# Altium PCB MASTERs26_PCB.PcbDoc (part 3 of 3)
Units mm, origin at the board's own origin, x right, y up, seen from the top; angles counter-clockwise.
Board outline 170 x 105 mm, 4 copper layers (Top Layer, Layer 2, PWR, Bottom Layer), stack 1.58 mm thick; 78 components, 59 nets, 255 pads, 54 vias.
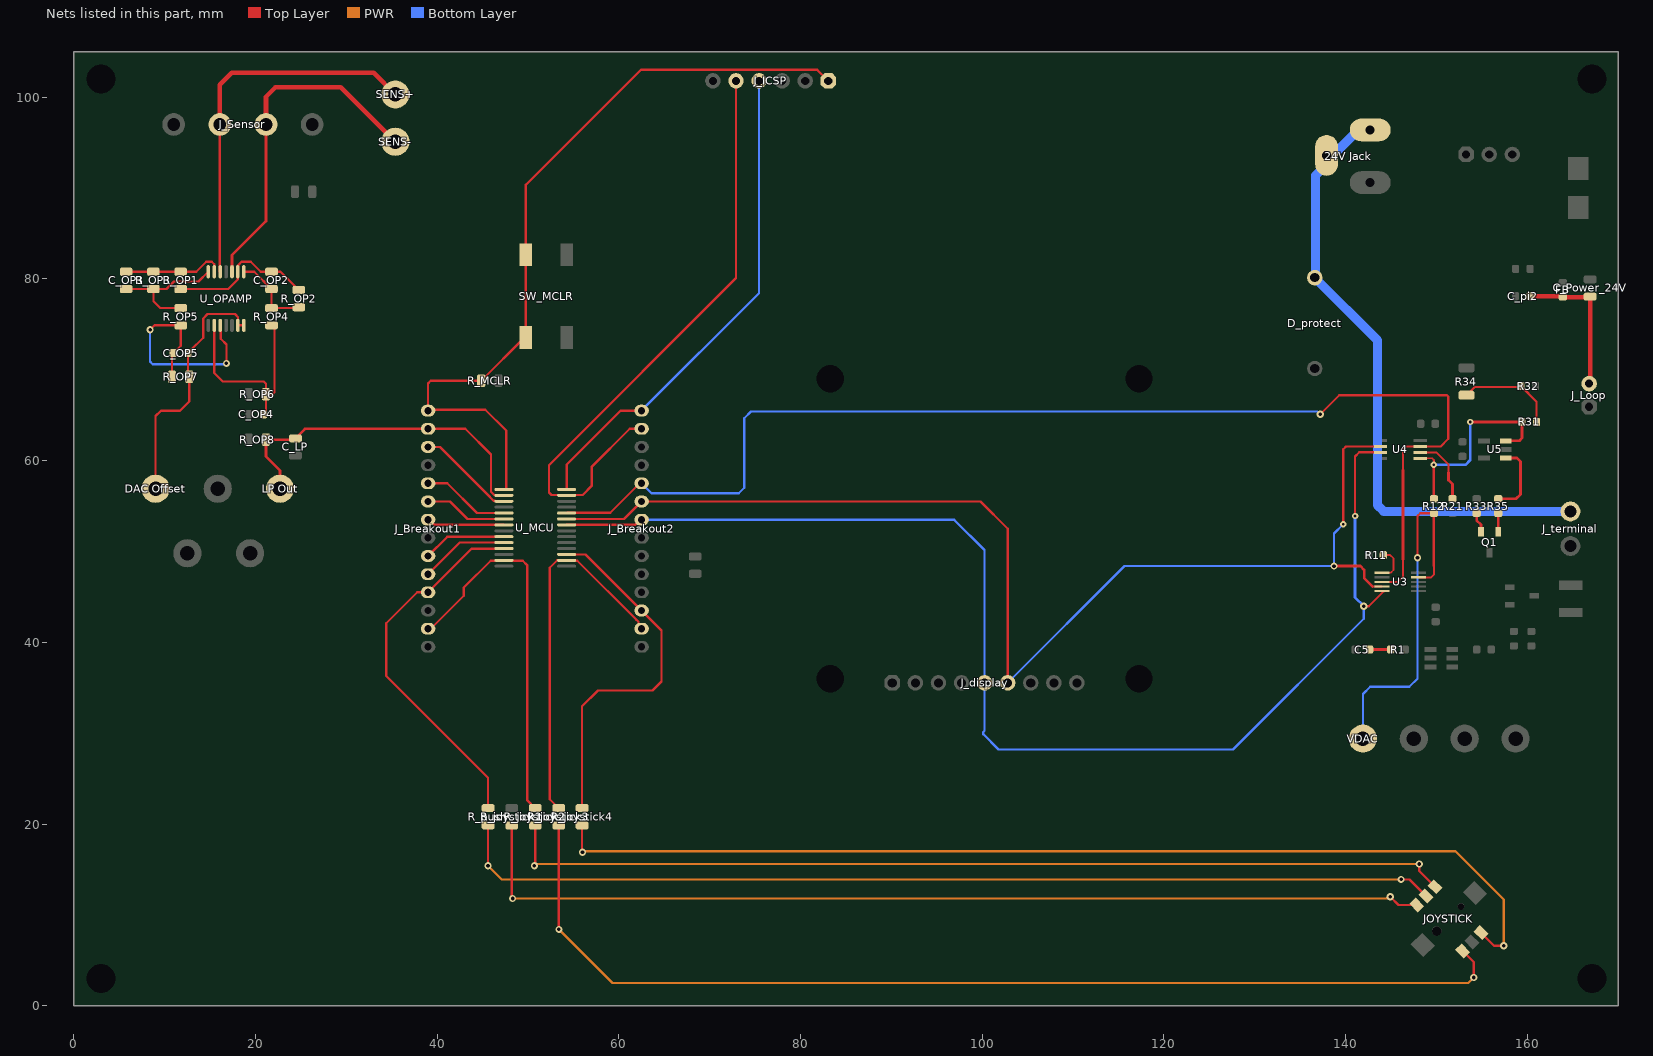
[diagram p4: the nets of this part, all layers, seen from the top]

## Via types
v1: diameter 0.8, hole 0.4, Top Layer to Bottom Layer, 30 vias
v2: diameter 0.7, hole 0.3, Top Layer to Bottom Layer, 24 vias

## Nets (pads, with @x,y where several pads share a name; then routed paths per layer and width w, separated by ;. In a path a pad name is that pad's centre, name@x,y a point inside that pad or via, vN(x,y) a via of type N, cw(c..) or ccw(c..) an arc to the next point about the centre after c; other vN are vias at no path point) (continued)
JOY2: J_Breakout1.13 R_joystick2.2 U_MCU.13 | length 41.9
  Top Layer w0.254: J_Breakout1.13@39,41.5 39.297,41.5 42.92,45.123 42.92,46.02 45.887,48.987 47.312,48.987 U_MCU.13@47.35,49.025 47.388,48.987 49.413,48.987 49.9,48.5 49.9,22.645 R_joystick2.2@50.8,21.745
JOY3: J_Breakout2.13 R_joystick3.1 U_MCU.16 | length 40.7
  Top Layer w0.254: R_joystick3.1@53.375,21.745 52.4,22.72 52.4,48.201 53.224,49.025 U_MCU.16@54.25,49.025 54.288,48.987 55.251,48.987 55.262,48.977 55.421,48.977 61.925,42.473 61.927,42.473 62.15,42.25 62.15,41.85 J_Breakout2.13@62.5,41.5
JOY4: J_Breakout2.12 R_joystick4.1 U_MCU.17 | length 40.6
  Top Layer w0.254: U_MCU.17@54.25,49.675 56.325,49.675 J_Breakout2.12@62.5,43.5 64.7,41.3 64.7,35.7 63.7,34.7 57.7,34.7 55.95,32.95 R_joystick4.1@55.95,21.745
JOY_PUSH: J_Breakout1.11 R_push.1 U_MCU.11 | length 41.3
  Top Layer w0.254: R_push.1@45.6,21.75 45.6,25.1 34.4,36.3 34.4,42.1 37.8,45.5 J_Breakout1.11@39,45.5 43.787,50.287 47.312,50.287 U_MCU.11@47.35,50.325
LPF_OUT: "LP Out.1" C_LP.2 J_Breakout1.2 R_OP8.2 U_MCU.2 | length 38.2
  Top Layer w0.254: J_Breakout1.2@39,63.5 43.1,63.5 45.923,60.677 45.923,56.576 46.276,56.223 46.338,56.223 46.349,56.213 47.312,56.213 U_MCU.2@47.35,56.175
  Top Layer w0.3: 22.7,56.9 22.7,58.9 21.15,60.45 R_OP8.2@21.15,62.3 24.25,62.3 C_LP.2@24.4,62.45 25.45,63.5 J_Breakout1.2@39,63.5
M\C\L\R\: J_Breakout1.1 J_ICSP.1 R_MCLR.2 SW_MCLR.1 SW_MCLR.2 U_MCU.1 | length 87.8
  Top Layer w0.254: U_MCU.1@47.35,56.825 47.509,56.825 47.6,56.916 47.6,63.3 45.3,65.6 39.1,65.6 J_Breakout1.1@39,65.5 39,68.5 39.3,68.8 R_MCLR.2@44.85,68.8 49.6,73.55 SW_MCLR.1@49.75,73.55 SW_MCLR.2@49.75,82.481 ; SW_MCLR.2@49.75,82.65 49.75,90.35 62.427,103.027 81.823,103.027 J_ICSP.1@83.05,101.8
"Net24V Jack_2": "24V Jack.2" "24V Jack.3" D_protect.2 J_terminal.2 | length 69.4
  Bottom Layer w1: 142.7,96.4 141.415,96.4 139.2,94.185 138.485,94.185 137.9,93.6 137.9,92.6 136.7,91.4 136.7,80.239 D_protect.2@136.6,80.139 143.5,73.239 143.5,55.1 144.196,54.404 J_terminal.2@164.739,54.404
NetC5_2: C5.2 R1.1 | length 2.3
  Top Layer w0.3: C5.2@142.639,39.202 R1.1@144.961,39.202
NetC_OP2_1: C_OP2.1 R_OP1.2 R_OP2.1 U_OPAMP.2 | length 16.4
  Top Layer w0.25: R_OP1.2@11.763,78.888 16.991,78.888 18.063,79.959 U_OPAMP.2@18.063,80.788 18.063,81.476 18.474,81.888 19.47,81.888 20.57,80.788 C_OP2.1@21.763,80.788 22.763,80.788 R_OP2.1@24.763,78.788
NetC_OP2_2: C_OP2.2 R_OP2.2 R_OP4.2 U_OPAMP.1 | length 8.8
  Top Layer w0.25: U_OPAMP.1@18.713,80.788 19.863,80.788 C_OP2.2@21.763,78.888 R_OP4.2@21.763,76.788 R_OP2.2@24.663,76.788
NetC_OP3_1: C_OP3.1 R_OP1.1 R_OP3.1 U_OPAMP.6 | length 11.1
  Top Layer w0.25: C_OP3.1@5.763,80.788 R_OP3.1@8.763,80.788 R_OP1.1@11.763,80.788 13.474,80.788 14.574,81.888 15.191,81.888 15.463,81.616 U_OPAMP.6@15.463,80.788
NetC_OP3_2: C_OP3.2 R_OP3.2 R_OP5.1 U_OPAMP.7 | length 14.5
  Top Layer w0.25: C_OP3.2@5.763,78.888 R_OP3.2@8.763,78.888 ; R_OP5.1@11.763,76.788 9.512,76.788 8.763,77.538 R_OP3.2@8.763,78.888 ; U_OPAMP.7@14.813,80.788 13.738,79.713 11.039,79.713 10.214,78.888 R_OP3.2@8.763,78.888
NetC_OP4_1: C_OP4.1 R_OP4.1 R_OP6.1 U_OPAMP.9 | length 23.4
  Top Layer w0.254: U_OPAMP.9@15.463,74.888 15.463,69.638 16.4,68.7 20.9,68.7 21.15,68.45 R_OP6.1@21.15,67.3 ; C_OP4.1@20.9,65.1 21.15,65.35 R_OP6.1@21.15,67.3 ; R_OP4.1@21.763,74.888 21.784,74.888 22.1,74.572 22.1,67.515 21.885,67.3 R_OP6.1@21.15,67.3
NetC_OP5_1: C_OP5.1 R_OP5.2 R_OP7.1 U_OPAMP.10 | length 26.2
  Top Layer w0.25: v1(8.4,74.4) 8.888,74.888 R_OP5.2@11.763,74.888 11.763,72.638 C_OP5.1@10.963,71.838 10.8,71.675 R_OP7.1@10.8,69.232 ; U_OPAMP.10@16.113,74.888 16.113,74.322 16.188,74.247 16.188,74.181 16.188,73.403 16.8,72.79 v1(16.8,70.7)
  Bottom Layer w0.25: v1(8.4,74.4) 8.4,70.9 8.7,70.6 16.7,70.6 v1(16.8,70.7)
NetC_OP5_2: "DAC Offset.1" C_OP5.2 R_OP7.2 U_OPAMP.13 U_OPAMP.14 | length 28
  Top Layer w0.25: 9,56.9 9,64.9 9.6,65.5 11.7,65.5 12.7,66.5 R_OP7.2@12.7,69.232 12.563,69.37 12.563,71.847 12.878,72.163 12.888,72.163 14.238,73.513 14.238,75.651 14.724,76.138 17.737,76.138 18.085,75.79 18.085,74.91 U_OPAMP.13@18.063,74.888 U_OPAMP.14@18.713,74.888
NetC_pi2_2: C_pi2.2 C_Power_24V.2 FB.2 J_Loop.2 | length 16.3
  Top Layer w0.5: C_pi2.2@160.3,78.1 163.8,78.1 FB.2@163.9,78 166.85,78 C_Power_24V.2@166.9,78.05 166.9,68.57 J_Loop.2@166.8,68.47
NetJOYSTICK_1: JOYSTICK.1 R_joystick2.1 | length 105.2
  Top Layer w0.254: v1(50.7,15.4) 50.8,15.5 R_joystick2.1@50.8,19.845 ; v1(148.1,15.6) 148.1,14.828 JOYSTICK.1@149.836,13.092
  PWR w0.254: v1(50.7,15.4) 50.848,15.4 51.048,15.6 v1(148.1,15.6)
NetJOYSTICK_2: JOYSTICK.2 R_push.2 | length 109.1
  Top Layer w0.254: v1(45.6,15.4) R_push.2@45.6,19.85 ; v1(146.1,13.9) 147.013,13.9 JOYSTICK.2@148.829,12.084
  PWR w0.254: v1(45.6,15.4) 47.1,13.9 v1(146.1,13.9)
NetJOYSTICK_3: JOYSTICK.3 R_joystick1.2 | length 108.1
  Top Layer w0.254: R_joystick1.2@48.2,19.85 48.2,11.9 v1(48.3,11.8) ; v1(144.9,12) 145.823,11.077 JOYSTICK.3@147.821,11.077
  PWR w0.254: v1(48.3,11.8) 144.552,11.8 144.752,12 v1(144.9,12)
NetJOYSTICK_4: JOYSTICK.4 R_joystick4.2 | length 114.8
  Top Layer w0.25: R_joystick4.2@55.95,19.845 55.95,16.95 v1(56,16.9) ; JOYSTICK.4@154.892,8.036 156.328,6.6 v1(157.4,6.6)
  PWR w0.25: v1(56,16.9) 56.1,17 152.1,17 157.4,11.7 v1(157.4,6.6)
NetJOYSTICK_6: JOYSTICK.6 R_joystick3.2 | length 118.3
  Top Layer w0.25: R_joystick3.2@53.375,19.845 53.375,8.425 v1(53.4,8.4) ; JOYSTICK.6@152.877,6.021 154.1,4.798 v1(154.1,3.1)
  PWR w0.25: v1(53.4,8.4) 59.3,2.5 153.5,2.5 v1(154.1,3.1)
NetQ1_1: Q1.1 R35.2 | length 2
  Top Layer w0.3: Q1.1@156.797,52.173 R35.2@156.797,54.199
NetQ1_2: Q1.2 R33.2 | length 2.2
  Top Layer w0.3: R33.2@154.422,54.199 154.422,53.429 154.897,52.954 Q1.2@154.897,52.173
NetR11_2: R11.2 U3.6 | length 4
  Top Layer w0.2: U3.6@143.991,47.649 144.958,47.649 145.266,47.958 145.266,49.248 144.914,49.6 R11.2@144.141,49.6
NetR31_1: R31.1 R32.1 R34.1 | length 11.1
  Top Layer w0.254: R34.1@153.3,67.2 154.2,68.1 159.2,68.1 R32.1@159.3,68.2 161.011,66.489 R31.1@161.011,64.259
NetR35_1: R35.1 U5.1 | length 8
  Top Layer w0.3: R35.1@156.797,55.799 158.761,55.799 159.239,56.277 159.239,59.886 158.843,60.282 U5.1@157.622,60.282
P0B: R21.2 U4.6 | length 7.6
  Top Layer w0.2: U4.6@148.216,60.907 149.963,60.907 151.323,59.547 151.323,58.699
  Top Layer w0.3: 151.323,58.699 151.323,57.849 151.765,57.407 R21.2@151.765,55.799
P0W: R12.2 R31.2 U4.5 U5.3 | length 23.6
  Top Layer w0.2: U4.5@148.216,60.257 149.514,60.257 149.71,60.061 v2(149.71,59.532)
  Top Layer w0.3: R12.2@149.71,55.799 v2(149.71,59.532) ; v2(153.714,64.251) 153.722,64.259 R31.2@159.411,64.259 159.411,62.482 159.111,62.182 U5.3@157.622,62.182
  Bottom Layer w0.3: v2(149.71,59.532) 153.189,59.532 153.714,60.056 v2(153.714,64.251)
PGC: J_Breakout2.2 J_ICSP.5 U_MCU.27 | length 68.4
  Top Layer w0.254: J_Breakout2.2@62.5,63.5 61.2,63.5 57,59.3 57,57.2 56.013,56.213 54.25,56.213 53.249,56.213 53.238,56.223 52.577,56.223 52.3,56.5 52.3,59.5 72.89,80.09 J_ICSP.5@72.89,101.8
PGD: J_Breakout2.1 J_ICSP.4 U_MCU.28 | length 55.1
  Top Layer w0.254: U_MCU.28@54.25,56.825 54.25,59.55 60.2,65.5 J_Breakout2.1@62.5,65.5
  Bottom Layer w0.254: J_Breakout2.1@62.5,65.5 75.43,78.43 J_ICSP.4@75.43,101.8
RA1: J_Breakout1.3 U_MCU.3 | length 10.8
  Top Layer w0.254: J_Breakout1.3@39,61.5 40.3,61.5 45.419,56.381 45.419,56.367 46.213,55.573 46.338,55.573 46.349,55.563 47.312,55.563 U_MCU.3@47.35,55.525
RA3: J_Breakout1.5 U_MCU.5 | length 9.7
  Top Layer w0.254: J_Breakout1.5@39,57.5 41.1,57.5 44.375,54.225 U_MCU.5@47.35,54.225
RA4: J_Breakout1.6 U_MCU.6 | length 9.1
  Top Layer w0.254: J_Breakout1.6@39,55.5 41.4,55.5 43.325,53.575 U_MCU.6@47.35,53.575
RA5: J_Breakout1.7 U_MCU.7 | length 8.6
  Top Layer w0.254: J_Breakout1.7@39,53.5 39.15,53.5 39.725,52.925 U_MCU.7@47.35,52.925
RA6: J_Breakout1.10 U_MCU.10 | length 9.8
  Top Layer w0.254: J_Breakout1.10@39,47.5 42.475,50.975 U_MCU.10@47.35,50.975
RA7: J_Breakout1.9 U_MCU.9 | length 9.2
  Top Layer w0.254: J_Breakout1.9@39,49.5 41.125,51.625 U_MCU.9@47.35,51.625
SCK: J_Breakout2.6 J_display.6 U3.9 U4.2 U_MCU.23 | length 133
  Top Layer w0.2: 142.951,46.149 U3.9@143.991,46.149
  Top Layer w0.25: v2(139.739,52.999) 139.739,61.262 140.034,61.557 U4.2@143.816,61.557
  Top Layer w0.254: U_MCU.23@54.25,53.575 60.575,53.575 J_Breakout2.6@62.5,55.5 99.8,55.5 102.795,52.505 J_display.6@102.795,35.541
  Top Layer w0.3: v1(138.721,48.39) 141.61,48.39 142.041,47.959 142.041,47.059 142.951,46.149
  Bottom Layer w0.254: J_display.6@102.795,35.541 115.644,48.39 v1(138.721,48.39) 138.721,51.981 v2(139.739,52.999)
SDI_MCU: J_Breakout2.5 U3.8 U4.7 U_MCU.24 | length 134.8
  Top Layer w0.2: U3.8@143.991,46.649 145.742,46.649 146.316,47.223 146.316,49.153 ; 146.316,58.976 146.316,61.191 146.683,61.557 U4.7@148.216,61.557
  Top Layer w0.254: U_MCU.24@54.25,54.225 54.288,54.263 59.063,54.263 62.3,57.5 J_Breakout2.5@62.5,57.5 ; v1(137.2,65.1) 139.3,67.2 151.151,67.2 151.3,67.051 151.3,62.4 150.457,61.557 U4.7@148.216,61.557
  Top Layer w0.3: 146.316,49.153 146.316,58.976
  Bottom Layer w0.254: J_Breakout2.5@62.5,57.5 63.6,56.4 73.2,56.4 73.8,57 73.8,64.651 74.549,65.4 136.864,65.4 137.164,65.1 v1(137.2,65.1)
SDO_MCU: J_Breakout2.7 J_display.5 U3.10 U4.3 U_MCU.22 | length 140.6
  Top Layer w0.25: v2(141.039,53.896) 141.039,58.999 141.039,60.462 141.484,60.907 U4.3@143.816,60.907
  Top Layer w0.254: U_MCU.22@54.25,52.925 61.775,52.925 62.35,53.5 J_Breakout2.7@62.5,53.5 ; v1(141.995,43.973) 142.55,43.973 U3.10@144.2,45.622
  Bottom Layer w0.254: J_Breakout2.7@62.5,53.5 96.9,53.5 100.255,50.145 J_display.5@100.255,35.541 100.255,30.255 100.105,30.105 100.105,29.895 101.8,28.2 127.6,28.2 141.995,42.595 v1(141.995,43.973)
  Bottom Layer w0.3: v2(141.039,53.896) 141.039,44.929 v1(141.995,43.973)
SENSOR_IN+: J_Sensor.3 SENS+.1 U_OPAMP.5 | length 41.4
  Top Layer w0.3: U_OPAMP.5@16.08,80.82 J_Sensor.3@16.08,97
  Top Layer w0.5: J_Sensor.3@16.08,97 16.08,101.38 17.4,102.7 33,102.7 SENS+.1@35.4,100.3
SENSOR_IN-: J_Sensor.2 SENS-.1 U_OPAMP.3 | length 38
  Top Layer w0.3: U_OPAMP.3@17.413,80.788 17.413,82.613 21.16,86.36 J_Sensor.2@21.16,97
  Top Layer w0.5: J_Sensor.2@21.16,97 21.16,100.06 22.2,101.1 29.4,101.1 SENS-.1@35.4,95.1
VDAC: R12.1 U3.4 VDAC.1 | length 40
  Top Layer w0.2: U3.4@148.041,47.149 149.408,47.149 149.71,47.451 149.71,48.435
  Top Layer w0.254: v1(147.9,49.3) 147.9,53.9 148.199,54.199 R12.1@149.71,54.199
  Top Layer w0.3: 149.71,48.435 R12.1@149.71,54.199
  Bottom Layer w0.254: VDAC.1@141.9,29.4 141.9,34.3 142.7,35.1 147,35.1 147.9,36 v1(147.9,49.3)
pads on no net: J_display.8 J_ICSP.6 JOYSTICK.9 JOYSTICK.10 U3.5

## Polygon pours and split planes (outlines as drawn)
GND on Bottom Layer "GND_L04_P007" (solid, remove dead copper, pour order 7): 0,0 0,105 170,105 170,0
GND on Top Layer "GND_L01_P008" (solid, remove dead copper, pour order 8): 0,0 0,105 170,105 170,0
3.3V on PWR "3.3V_L03_P009" (solid, remove dead copper, pour order 9): 0,0 0,105 170,105 170,0
GND on Layer 2 "GND_L02_P010" (solid, remove dead copper, pour order 10): 0,0 0,105 170,105 170,0

## Keep-outs
Keep-Out Layer:
  text "'.Layer_Name'" at 295.5,-112.75 h1.5

## Other copper
Top Layer:
  text "'.ProjectPCBFabRevision'" at 330.678,-112.572 h1.5
  text "'.Layer_Name'" at 295.5,-112.75 h1.5
Bottom Layer:
  text "'.ProjectPCBFabNumber'-R'.ProjectPCBFabRevision'" at 223.219,-63.22 h1.2
  text ".ProjectPCBFabRevision" at 330.678,-112.572 h1.5
  text "'.Layer_Name'" at 295.5,-112.75 h1.5

## Silkscreen, mask and mechanical layers (free items; w line width, h text height)
Top Overlay:
  region: 284.8,-76.1 284.8,-74.1 286.8,-75.1
  lines w0.254: 134.882,105 134.882,73.318 135.19,73.01 170,73.01
  lines w0.5: 0.9,32.3 31.7,32.3 31.7,85.4 0.9,85.4 0.9,32.3 ; 32.3,32.3 71.4,32.3 71.4,85.4 32.3,85.4 32.3,32.3 ; 130.4,25.7 168.8,25.7 168.8,72.2 130.4,72.2 130.4,25.7
  text "GND" at 9.5,102.6 h1
  text "SENS+" at 13.667,102.6 h1
  text "SENS-" at 19.4,102.6 h1
  text "VDD" at 25.2,102.5 h1
  text "Terminal power" at 161.433,100.3 h1 r270
  text "PGC" at 72.3,99.6 h1 r270
  text "PGD" at 74.825,99.6 h1 r270
  text "GND" at 77.35,99.6 h1 r270
  text "VDD" at 79.875,99.6 h1 r270
  text "MCLR" at 82.4,99.6 h1 r270
  text "Jack power" at 149.933,97.9 h1 r270
  text "M" at 100.3,94.4 h10
  text "'.ProjectPartNumber'" at 97.2,90.9 h5
  text "/MCLR" at 34.9,65.1 h0.5
  text "PGD" at 64.4,65.1 h0.5
  text "PGC" at 64.4,63.3 h0.5
  text "ADC IN" at 34.483,63.1 h0.5
  text "/CS1_DAC" at 64.3,61.417 h0.5
  text "RA1" at 36.066,61.118 h0.5
  text "/CS2_DP" at 64.3,59.311 h0.5
  text "DACOffset" at 33.1,59.2 h0.5
  text "SDI_MCU" at 64.3,57.189 h0.5
  text "RA3" at 35.899,57.1 h0.5
  text "-" at 160.011,55.499 h2 r180
  text "SCK" at 64.3,55.294 h0.5
  text "RA4" at 35.899,55 h0.5
  text "SDO_MCU" at 64.3,53.263 h0.5
  text "RA5" at 35.899,53.1 h0.5
  text "+" at 160.011,51.449 h2 r180
  text "CS3_Adafruit" at 64.3,51.263 h0.5
  text "GND" at 35.899,51.1 h0.5
  text "VDD" at 64.3,49.27 h0.5
  text "RA7" at 35.899,49.1 h0.5
  text "GND" at 64.3,47.311 h0.5
  text "RA6" at 35.899,47.2 h0.5
  text "EIN" at 64.3,45.263 h0.5
  text "JOY PUSH" at 33.4,45 h0.5
  text "JOY UP" at 64.3,43.173 h0.5
  text "JOY LEFT" at 33.4,43 h0.5
  text "JOY RIGHT" at 64.3,41.198 h0.5
  text "JOY DOWN" at 33.4,41.1 h0.5
  text "I2C_SDA" at 64.3,39.159 h0.5
  text "I2C_SCK" at 33.983,38.983 h0.5
  text "EIN" at 89.4,33.083 h1 r270
  text "VDD" at 91.975,33.083 h1 r270
  text "VDD" at 94.55,33.083 h1 r270
  text "CS3" at 97.125,33.083 h1 r270
  text "SDO_MCU" at 99.7,33.083 h1 r270
  text "SCK" at 102.442,33.083 h1 r270
  text "GND" at 105.017,33.083 h1 r270
  text "NC" at 107.592,33.083 h1 r270
  text "VDD" at 110.167,33.083 h1 r270
  text "Microcontroller" at 37.9,29 h2
  text "Analog" at 10.5,28.966 h2
  text "Front End" at 7.6,25.3 h2
  text "Display Breakout" at 85.4,22.366 h2
  text "4-20mA Loop Driver" at 132.9,21.866 h2
  text "C" at 246.245,-66.043 h8
  text "1" at 255.096,-66.649 h5
  text "'.ProjectPartNumber'" at 214.71,-66.903 h1.2
  text "" at 239.245,-67.346 h8
  text "5" at 273.5,-68.194 h8
  text "7" at 283.5,-68.194 h8
  text "0" at 293.5,-68.194 h8
  text "1" at 303.5,-68.194 h8
  text "6" at 263.5,-68.227 h8
  text "2" at 313.5,-68.227 h8
  text "3" at 323.5,-68.227 h8
  text "4" at 333.58,-68.227 h8
  text "ICD" at 279.4,-76 h1.52
  text "" at 310,-82.959 h10
  text "" at 289,-82.984 h10
  text "" at 300,-82.984 h10
  text "" at 319,-82.984 h10
  text "" at 330,-82.984 h10
  text "" at 341,-83.159 h10
  text "*h" at 222.7,-84 h7
  text "" at 281,-86 h10
  text "dsPICDEM.net™" at 180.75,-92.75 h3
  text "mTouch®" at 203,-92.75 h3
  text "chipKIT™" at 217.25,-92.75 h3
  text "dsPICDEM™" at 180.5,-98.5 h3
  text "MPLAB®" at 203,-99 h3
  text "dsPIC®" at 217.25,-99 h3
  text "PICDEM.net™" at 180.5,-104.75 h3
  text "PICkit™" at 203.25,-105 h3
  text "PIC®" at 217.25,-105 h3
  text "PICDEM™" at 180.5,-111.25 h3
  text "PICtail™" at 203.25,-111.25 h3
  text "'.ProjectPCBFabRevision'" at 330.678,-112.572 h1.5
  text "'.Layer_Name'" at 295.5,-112.75 h1.5
Bottom Overlay:
  text "-" at 161.139,55.499 h2 r180
  text "+" at 161.139,51.533 h2 r180
  text "'.ProjectPCBFabRevision'" at 330.678,-112.572 h1.5
  text "'.Layer_Name'" at 295.5,-112.75 h1.5
Top Paste:
  text "'.ProjectPCBFabRevision'" at 330.678,-112.572 h1.5
  text "'.Layer_Name'" at 295.5,-112.75 h1.5
Bottom Paste:
  text "'.ProjectPCBFabRevision'" at 330.678,-112.572 h1.5
  text "'.Layer_Name'" at 295.5,-112.75 h1.5
Top Solder:
  text "'.ProjectPCBFabRevision'" at 330.678,-112.572 h1.5
  text "'.Layer_Name'" at 295.5,-112.75 h1.5
Bottom Solder:
  text "'.ProjectPCBFabRevision'" at 330.678,-112.572 h1.5
  text "'.Layer_Name'" at 295.5,-112.75 h1.5
NOTES (M1):
  text "'.Layer_Name'" at 313.5,-112.75 h1.5
BOARD (M2):
  the board outline again, w0.1
  text "'.ProjectPCBFabRevision'" at 330.678,-112.572 h1.5
  text "'.Layer_Name'" at 295.5,-112.75 h1.5
REF POINTS (M3):
  text "'.Layer_Name'" at 295.5,-112.75 h1.5
FAB (M4):
  drawing of 160 lines, arcs and shapes, not listed
  text "THIS PCB TO BE MANUFACTURED TO MEET ALL ACCEPTANCE LEVELS" at 232.93,109.486 h1.78
  text "OF A CLASS 2 PCB PER ANSI/IPC-A-600G." at 232.93,105.676 h1.78
  text "MATERIAL:" at 232.93,101.056 h1.78
  text "FR-4 or Equivalent" at 253.25,101.056 h1.78
  text "CONTROLLED IMPEDANCE" at 309.441,96.824 h1.78
  text "MULTILAYER" at 258.965,96.706 h1.78
  text "2" at 282.46,96.706 h1.78
  text "LAYERS" at 286.905,96.706 h1.78
  text "Cu WEIGHT EXTERNAL LAYERS" at 253.25,91.856 h1.78
  text "35um" at 305.32,91.856 h1.78
  text "FINISHED" at 314.845,91.856 h1.78
  text "Cu WEIGHT INTERNAL LAYERS" at 253.25,87.006 h1.78
  text "N/A" at 305.32,87.006 h1.78
  text "FINISHED" at 314.845,87.006 h1.78
  text "FINISHED OVERALL THICKNESS" at 253.25,82.156 h1.78
  text "1.6" at 306.59,82.156 h1.78
  text "mm" at 314.845,82.156 h1.78
  text "10" at 329.45,82.156 h1.78
  text "%" at 337.705,82.156 h1.78
  text "COPPER THIEVING ALLOWED" at 253.441,77.324 h1.78
  text "YES" at 310.441,77.324 h1.78
  text "NO" at 327.441,77.324 h1.78
  text "X" at 322.032,76.824 h2.6
  text "FINISH:" at 232.941,72.824 h1.78
  text "LEAD-FREE HOT AIR LEVELING" at 258.941,72.524 h1.78
  text "X" at 254.341,71.824 h2.6
  text "IMMERSION GOLD" at 258.965,66.986 h1.78
  text "IMMERSION TIN" at 258.965,61.486 h1.78
  text "SMOBC WITH SELECTIVE GOLD PLATING ON LANDS" at 258.965,57.781 h1.78
  text "INDICATED. 1um GOLD OVER 5-10 um NICKEL" at 258.965,53.971 h1.78
  text "SOLDERMASK" at 253.25,48.636 h1.78
  text "DYNACHEM EPIC 200 LPI OR EQUIVALENT" at 274.84,48.636 h1.78
  text "SOLDERMASK COLOR" at 253.25,42.286 h1.78
  text "GREEN HIGH GLOSS" at 285,42.286 h1.78
  text "SILKSCREEN COLOR" at 253.25,35.936 h1.78
  text "WHITE" at 285,35.936 h1.78
  text "Blind / Burried Vias" at 259.441,29.824 h1.78
  text "DRILLING:" at 233.441,29.574 h1.78
  text "Via Layer Pairs" at 253.941,25.074 h1.78
  text "Top-Bottom" at 274.691,25.074 h1.78
  text "ALL HOLES TO BE LOCATED BY THE COORDINATES FROM THE NC DRILL DATA PROVIDED." at 232.93,19.824 h1.78
  text "'.ProjectPCBFabNumber'" at 264.941,13.324 h1.78
  text "PCB REV" at 300.941,13.324 h1.78
  text "USE ARTWORK SET NO." at 232.93,13.236 h1.78
  text "'.ProjectPCBFabRevision'" at 314.091,13.074 h1.78
  text "ALL UL LOGO, MANUFACTURER'S ID, AND DATE CODES SHALL BE PLACED" at 232.93,6.886 h1.78
  text "ON THE BOTTOM SIDE UNLESS OTHERWISE INDICATED." at 232.93,3.076 h1.78
  text "ANY ALTERNATIVES TO THE ABOVE SPECIFICATIONS MUST FIRST BE APPROVED." at 232.441,-2.176 h1.78
  text "Layer" at 232.794,-14.75 h1.5
  text "Name" at 242.942,-14.75 h1.5
  text "Material" at 266.086,-14.75 h1.5
  text "Thickness" at 287.48,-14.75 h1.5
  text "Constant" at 303.626,-14.75 h1.5
  text "Gerber" at 317.772,-14.75 h1.5
  text "Top Overlay" at 242.942,-17.75 h1.5
  text "GTO" at 317.772,-17.75 h1.5
  text "Top Solder" at 242.942,-20.75 h1.5
  text "Solder Resist" at 266.086,-20.75 h1.5
  text "0.010mm" at 287.48,-20.75 h1.5
  text "3.5" at 303.626,-20.75 h1.5
  text "GTS" at 317.772,-20.75 h1.5
  text "1" at 232.794,-23.75 h1.5
  text "Top Layer" at 242.942,-23.75 h1.5
  text "0.035mm" at 287.48,-23.75 h1.5
  text "GTL" at 317.772,-23.75 h1.5
  text "Dielectric 1" at 242.942,-26.75 h1.5
  text "PP-006" at 266.086,-26.75 h1.5
  text "0.200mm" at 287.48,-26.75 h1.5
  text "4.1" at 303.626,-26.75 h1.5
  text "2" at 232.794,-29.75 h1.5
  text "Layer 2" at 242.942,-29.75 h1.5
  text "CF-004" at 266.086,-29.75 h1.5
  text "0.035mm" at 287.48,-29.75 h1.5
  text "G1" at 317.772,-29.75 h1.5
  text "Dielectric1" at 242.942,-32.75 h1.5
  text "FR-4" at 266.086,-32.75 h1.5
  text "1.200mm" at 287.48,-32.75 h1.5
  text "4.8" at 303.626,-32.75 h1.5
  text "3" at 232.794,-35.75 h1.5
  text "PWR" at 242.942,-35.75 h1.5
  text "CF-004" at 266.086,-35.75 h1.5
  text "0.035mm" at 287.48,-35.75 h1.5
  text "G2" at 317.772,-35.75 h1.5
  text "Dielectric 4" at 242.942,-38.75 h1.5
  text "PP-006" at 266.086,-38.75 h1.5
  text "0.200mm" at 287.48,-38.75 h1.5
  text "4.1" at 303.626,-38.75 h1.5
  text "4" at 232.794,-41.75 h1.5
  text "Bottom Layer" at 242.942,-41.75 h1.5
  text "0.035mm" at 287.48,-41.75 h1.5
  text "GBL" at 317.772,-41.75 h1.5
  text "Bottom Solder" at 242.942,-44.75 h1.5
  text "Solder Resist" at 266.086,-44.75 h1.5
  text "0.010mm" at 287.48,-44.75 h1.5
  text "3.5" at 303.626,-44.75 h1.5
  text "GBS" at 317.772,-44.75 h1.5
  text "Bottom Overlay" at 242.942,-47.75 h1.5
  text "GBO" at 317.772,-47.75 h1.5
  text "Total board thickness:" at 232.794,-50.75 h1.5
  text "1.760mm" at 287.48,-50.75 h1.5
  text "'.ProjectPCBFabRevision'" at 330.678,-112.572 h1.5
  text "'.Layer_Name'" at 295.5,-112.75 h1.5
Case (M5):
  text "'.Layer_Name'" at 295.5,-112.75 h1.5
Cover (M6):
  text "'.Layer_Name'" at 295.5,-112.75 h1.5
Terminal Block (M7):
  text "'.Layer_Name'" at 295.5,-112.75 h1.5
Route Tool Path:
  text "'.Layer_Name'" at 295.5,-112.75 h1.5
V-Cut (M9):
  text "'.Layer_Name'" at 295.5,-112.75 h1.5
Bottom Assembly:
  text "'.VariantName'" at 45.07,-96.75 h0.9
  text "ASSEMBLY VARIANT:" at 59.32,-96.75 h0.9
  text "DOCUMENT NUMBER:" at 13.05,-105 h1.15
  text "'.ProjectPCBAssyNumber'_ASSY-D" at 13.177,-108 h1.4
  text "'.ProjectPCBAssyRevision'" at -3.878,-112.572 h1.5
  text "'.Layer_Name'" at 31,-112.75 h1
Top Assembly:
  text "ASSEMBLY NOTES:" at 138.9,-76.3 h4
  text "1. ALL COMPONENTS SHALL BE RoHS COMPLIANT." at 104.8,-81.4 h3
  text "2. ALL UNUSED THROUGH HOLE COMPONENT LOCATIONS SHALL BE FREE OF SOLDER." at 104.8,-84.4 h3
  text "3. ALL COMPONENTS SHALL BE MOUNTED FLUSH TO THE BOARD, EXCEPT AS NOTED." at 104.8,-87.4 h3
  text "4. FINISHED BOARD SHALL BE FREE OF ALL RESIDUES." at 104.8,-90.4 h3
  text "5. PLACE LABEL  ON THE LOCATION INDICATED." at 104.8,-93.4 h3
  text "6." at 104.8,-96.4 h3
  text "ASSEMBLY VARIANT:" at 267.5,-96.75 h0.9
  text "'.VariantName'" at 281.75,-96.75 h0.9
  text "DOCUMENT NUMBER:" at 313.75,-105 h1.15
  text "'.ProjectPCBAssyNumber'_ASSY-D" at 313.7,-108 h1.4
  text "'.ProjectPCBAssyRevision'" at 330.678,-112.572 h1.5
  text "'.Layer_Name'" at 295.5,-112.75 h1
Bottom 3D Body:
  text "'.Layer_Name'" at 295.5,-112.75 h1.15
Top 3D Body:
  text "'.Layer_Name'" at 295.5,-112.75 h1.2
Bottom Courtyard:
  text ".ProjectPCBFabRevision" at 330.678,-112.572 h1.5
  text "'.Layer_Name'" at 295.5,-112.75 h1
Top Courtyard:
  text "'.ProjectPCBFabRevision'" at 330.678,-112.572 h1.5
  text "'.Layer_Name'" at 295.5,-112.75 h1.1
TITLE (M16):
  lines w0.1: 267,-95.5 348.82,-95.5 ; 319,-88 319,-91 348.82,-91 ; 337.54,-112.635 337.54,-111.365 ; 337.54,-112 347.7,-112 ; 337.7,-110.8 337.7,-109.8 ; 337.7,-110.3 347.7,-110.3 ; 340.08,-112.635 340.08,-111.365 ; 342.62,-112.635 342.62,-111.365 ; 342.7,-110.6 342.7,-110 ; 345.16,-112.635 345.16,-111.365 ; 347.7,-112.635 347.7,-111.365 ; 347.7,-110.8 347.7,-109.8 ; 348.82,-91 348.82,-91
  lines w0.127: -27.1,-58.175 -22.02,-58.175 ; -27.1,2.15 -22.02,2.15 ; -27.1,62.475 -22.02,62.475 ; 36.4,-118.5 36.4,-113.42 ; 36.4,117.72 36.4,122.8 ; 99.9,-118.5 99.9,-113.42 ; 99.9,117.72 99.9,122.8 ; 163.4,-118.5 163.4,-113.42 ; 163.4,117.72 163.4,122.8 ; 198.96,-113.42 234.52,-113.42 ; 226.9,-118.5 226.9,-113.42 ; 226.9,117.72 226.9,122.8 ; 267,-113.42 267,-88 ; 267,-109 348.82,-109 ; 267,-103 348.82,-103 ; 267,-97 348.82,-97 ; 290.4,-118.5 290.4,-113.42 ; 290.4,117.72 290.4,122.8 ; 295,-113.42 295,-97 ; 313,-109 313,-103 ; 326,-113.42 326,-109 ; 333.5,-113.42 333.5,-103 ; 348.82,-82.94 348.82,-113.42 ; 348.82,-58.175 353.9,-58.175 ; 348.82,2.15 353.9,2.15 ; 348.82,62.475 353.9,62.475 ; 348.82,-113.42 348.82,-88 233,-88 233,-113.42 348.82,-113.42 ; 348.82,-113.42 -22.02,-113.42 -22.02,117.72 348.82,117.72 348.82,-113.42 ; -27.1,-118.5 353.9,-118.5 353.9,122.8 -27.1,122.8 -27.1,-118.5
  text "1" at 4.176,119.498 h1.78
  text "2" at 67.566,119.498 h1.78
  text "3" at 130.795,119.498 h1.78
  text "4" at 194.465,119.498 h1.78
  text "5" at 257.939,119.498 h1.78
  text "6" at 321.566,119.498 h1.78
  text "A" at -25.195,90.466 h1.78
  text "A" at 350.725,90.466 h1.78
  text "B" at -25.195,30.014 h1.78
  text "B" at 350.725,30.014 h1.78
  text "C" at -25.195,-30.311 h1.78
  text "C" at 350.725,-30.311 h1.78
  text "PART NUMBER:" at 320,-90 h1.15
  text "'.ProjectpartNumber'" at 332.5,-90.25 h1.5
  text "D" at -25.195,-90.509 h1.78
  text "TITLE:" at 268,-90.5 h1.15
  text "D" at 350.725,-90.509 h1.78
  text "'.ProjectTitle'" at 268,-94.5 h2.5
  text "PCB Layout Contact:" at 268,-99 h1.15
  text "PLOT NAME / GERBER FILE:" at 296,-99 h1.15
  text "'.ProjectContactPCB'" at 268,-102 h1.6
  text "'.Plot_File_Name'" at 296,-102 h1.5
  text "M" at 236,-104 h15.24
  text "Project Owner:" at 268,-105 h1.15
  text "PCB NUMBER:" at 296,-105 h1.15
  text "DATE:" at 334.7,-105 h1.15
  text "Microchip Technology Inc." at 234.77,-107.26 h1.78
  text "'.ProjectContactOwner'" at 268,-108 h1.6
  text "'.ProjectPCBFabNumber'" at 296,-108 h1.6
  text "'.PRINT_DATE'" at 334.7,-108 h1.5
  text "2355 W. Chandler Blvd." at 236,-110 h1.78
  text "LAYER NAME:" at 296,-110.5 h1.15
  text "10mm" at 334,-110.6 h0.7
  text "PCB FILE NAME:" at 268,-110.75 h1.15
  text "REV:" at 326.75,-110.75 h1.15
  text "400mil" at 333.9,-112.3 h0.7
  text "Chandler, AZ  85224" at 237,-112.5 h1.78
  text "'.PCB_FILE_NAME_NO_PATH'" at 268,-112.75 h1
  text "1" at 4.176,-116.722 h1.78
  text "2" at 67.566,-116.722 h1.78
  text "3" at 130.795,-116.722 h1.78
  text "4" at 194.465,-116.722 h1.78
  text "5" at 257.939,-116.722 h1.78
  text "6" at 321.566,-116.722 h1.78
Drill Drawing:
  circle w0.25: c-19.554,-50.216 r0.5
  circle w0.25: c-19.554,-50.216 r0.833
  circle w0.25: c-19.554,-53.966 r0.833
  lines w0.25: -20.387,-66.05 -19.554,-65.633 -18.72,-66.05 -19.137,-65.216 -18.72,-64.383 -19.554,-64.8 -20.387,-64.383 -19.97,-65.216 -20.387,-66.05 ; -20.387,-62.3 -20.387,-61.883 -19.97,-61.466 -20.387,-61.05 -20.387,-60.633 -19.97,-60.633 -19.554,-61.05 -19.137,-60.633 -18.72,-60.633 -18.72,-61.05 -19.137,-61.466 -18.72,-61.883 -18.72,-62.3 -19.137,-62.3 -19.554,-61.883 -19.97,-62.3 -20.387,-62.3 ; -20.387,-58.55 -18.72,-58.55 -18.72,-56.883 -20.387,-56.883 -20.387,-58.55 ; -20.387,-45.633 -18.72,-45.633 -19.554,-47.3 -20.387,-45.633 ; -20.387,-43.55 -18.72,-43.55 -18.72,-41.883 -20.387,-41.883 -20.387,-43.55 ; -20.387,-39.383 -19.97,-39.383 -19.554,-39.8 -19.137,-39.383 -18.72,-39.383 -19.137,-38.966 -18.72,-38.55 -19.137,-38.55 -19.554,-38.133 -19.97,-38.55 -20.387,-38.55 -19.97,-38.966 -20.387,-39.383 ; -20.387,-35.633 -19.97,-35.633 -19.97,-36.05 -19.137,-36.05 -19.137,-35.633 -18.72,-35.633 -18.72,-34.8 -19.137,-34.8 -19.137,-34.383 -19.97,-34.383 -19.97,-34.8 -20.387,-34.8 -20.387,-35.633 ; -20.387,-32.3 -19.554,-31.883 -18.72,-32.3 -19.137,-31.466 -18.72,-30.633 -19.554,-31.05 -20.387,-30.633 -19.97,-31.466 -20.387,-32.3 ; -20.387,-27.716 -19.554,-28.55 -18.72,-27.716 -19.554,-26.883 -20.387,-27.716 ; -20.387,-23.133 -18.72,-23.133 -19.554,-24.8 -20.387,-23.133 ; -20.387,-20.633 -19.97,-20.633 -19.97,-21.05 -19.137,-21.05 -19.137,-20.633 -18.72,-20.633 -18.72,-19.8 -19.137,-19.8 -19.137,-19.383 -19.97,-19.383 -19.97,-19.8 -20.387,-19.8 -20.387,-20.633 ; -20.054,-58.216 -19.054,-58.216 -19.054,-57.216 -20.054,-57.216 -20.054,-58.216 ; -20.054,-39.216 -19.804,-39.216 -19.554,-39.466 -19.304,-39.216 -19.054,-39.216 -19.304,-38.966 -19.054,-38.716 -19.304,-38.716 -19.554,-38.466 -19.804,-38.716 -20.054,-38.716 -19.804,-38.966 -20.054,-39.216 ; -20.054,-31.966 -19.554,-31.716 -19.054,-31.966 -19.304,-31.466 -19.054,-30.966 -19.554,-31.216 -20.054,-30.966 -19.804,-31.466 -20.054,-31.966 ; -20.054,-23.466 -19.054,-23.466 -19.554,-24.466 -20.054,-23.466 ; -20.054,-20.466 -19.804,-20.466 -19.804,-20.716 -19.304,-20.716 -19.304,-20.466 -19.054,-20.466 -19.054,-19.966 -19.304,-19.966 -19.304,-19.716 -19.804,-19.716 -19.804,-19.966 -20.054,-19.966 -20.054,-20.466
  lines w0.3: -21.882,-67.175 189.259,-67.175 ; -21.882,-18.425 189.259,-18.425 ; -8.11,-70.925 -8.11,-14.675 ; 9.336,-70.925 9.336,-14.675 ; 42.976,-70.925 42.976,-14.675 ; 55.623,-70.925 55.623,-14.675 ; 93.111,-70.925 93.111,-14.675 ; 107.857,-70.925 107.857,-14.675 ; 126.203,-70.925 126.203,-14.675 ; 154.194,-70.925 154.194,-14.675 ; -21.882,-70.925 189.259,-70.925 189.259,-14.675 -21.882,-14.675 -21.882,-70.925
  text "Symbol" at -19.632,-17.3 h1.8
  text "Hit Count" at -6.985,-17.3 h1.8
  text "Finished Hole Size" at 10.461,-17.3 h1.8
  text "Plated" at 44.101,-17.3 h1.8
  text "Drill Layer Pair" at 56.748,-17.3 h1.8
  text "Via/Pad" at 94.236,-17.3 h1.8
  text "Hole Type" at 108.982,-17.3 h1.8
  text "Hole Length" at 127.328,-17.3 h1.8
  text "Routed Path Length" at 155.319,-17.3 h1.8
  text "1" at -6.985,-21.05 h1.5
  text "0.750mm (29.53mil)" at 10.461,-21.05 h1.5
  text "NPTH" at 44.101,-21.05 h1.5
  text "Top Layer - Bottom Layer" at 56.748,-21.05 h1.5
  text "Pad" at 94.236,-21.05 h1.5
  text "Round" at 108.982,-21.05 h1.5
  text "-" at 127.328,-21.05 h1.5
  text "-" at 155.319,-21.05 h1.5
  text "1" at -6.985,-24.8 h1.5
  text "1.050mm (41.34mil)" at 10.461,-24.8 h1.5
  text "NPTH" at 44.101,-24.8 h1.5
  text "Top Layer - Bottom Layer" at 56.748,-24.8 h1.5
  text "Pad" at 94.236,-24.8 h1.5
  text "Round" at 108.982,-24.8 h1.5
  text "-" at 127.328,-24.8 h1.5
  text "-" at 155.319,-24.8 h1.5
  text "2" at -6.985,-28.55 h1.5
  text "1.300mm (51.18mil)" at 10.461,-28.55 h1.5
  text "PTH" at 44.101,-28.55 h1.5
  text "Top Layer - Bottom Layer" at 56.748,-28.55 h1.5
  text "Pad" at 94.236,-28.55 h1.5
  text "Round" at 108.982,-28.55 h1.5
  text "-" at 127.328,-28.55 h1.5
  text "-" at 155.319,-28.55 h1.5
  text "3" at -6.985,-32.3 h1.5
  text "1.000mm (39.37mil)" at 10.461,-32.3 h1.5
  text "PTH" at 44.101,-32.3 h1.5
  text "Top Layer - Bottom Layer" at 56.748,-32.3 h1.5
  text "Pad" at 94.236,-32.3 h1.5
  text "Slot" at 108.982,-32.3 h1.5
  text "3.000mm (118.11mil)" at 127.328,-32.3 h1.5
  text "2.000mm (78.74mil)" at 155.319,-32.3 h1.5
  text "4" at -6.985,-36.05 h1.5
  text "1.400mm (55.12mil)" at 10.461,-36.05 h1.5
  text "PTH" at 44.101,-36.05 h1.5
  text "Top Layer - Bottom Layer" at 56.748,-36.05 h1.5
  text "Pad" at 94.236,-36.05 h1.5
  text "Round" at 108.982,-36.05 h1.5
  text "-" at 127.328,-36.05 h1.5
  text "-" at 155.319,-36.05 h1.5
  text "4" at -6.985,-39.8 h1.5
  text "3.000mm (118.11mil)" at 10.461,-39.8 h1.5
  text "NPTH" at 44.101,-39.8 h1.5
  text "Top Layer - Bottom Layer" at 56.748,-39.8 h1.5
  text "Pad" at 94.236,-39.8 h1.5
  text "Round" at 108.982,-39.8 h1.5
  text "-" at 127.328,-39.8 h1.5
  text "-" at 155.319,-39.8 h1.5
  text "4" at -6.985,-43.55 h1.5
  text "3.200mm (125.98mil)" at 10.461,-43.55 h1.5
  text "NPTH" at 44.101,-43.55 h1.5
  text "Top Layer - Bottom Layer" at 56.748,-43.55 h1.5
  text "Pad" at 94.236,-43.55 h1.5
  text "Round" at 108.982,-43.55 h1.5
  text "-" at 127.328,-43.55 h1.5
  text "-" at 155.319,-43.55 h1.5
  text "11" at -6.985,-47.3 h1.5
  text "0.900mm (35.43mil)" at 10.461,-47.3 h1.5
  text "PTH" at 44.101,-47.3 h1.5
  text "Top Layer - Bottom Layer" at 56.748,-47.3 h1.5
  text "Pad" at 94.236,-47.3 h1.5
  text "Round" at 108.982,-47.3 h1.5
  text "-" at 127.328,-47.3 h1.5
  text "-" at 155.319,-47.3 h1.5
  text "11" at -6.985,-51.05 h1.5
  text "1.000mm (39.37mil)" at 10.461,-51.05 h1.5
  text "PTH" at 44.101,-51.05 h1.5
  text "Top Layer - Bottom Layer" at 56.748,-51.05 h1.5
  text "Pad" at 94.236,-51.05 h1.5
  text "Round" at 108.982,-51.05 h1.5
  text "-" at 127.328,-51.05 h1.5
  text "-" at 155.319,-51.05 h1.5
  text "11" at -6.985,-54.8 h1.5
  text "1.600mm (63.00mil)" at 10.461,-54.8 h1.5
  text "PTH" at 44.101,-54.8 h1.5
  text "Top Layer - Bottom Layer" at 56.748,-54.8 h1.5
  text "Pad" at 94.236,-54.8 h1.5
  text "Round" at 108.982,-54.8 h1.5
  text "-" at 127.328,-54.8 h1.5
  text "-" at 155.319,-54.8 h1.5
  text "24" at -6.985,-58.55 h1.5
  text "0.300mm (11.81mil)" at 10.461,-58.55 h1.5
  text "PTH" at 44.101,-58.55 h1.5
  text "Top Layer - Bottom Layer" at 56.748,-58.55 h1.5
  text "Via" at 94.236,-58.55 h1.5
  text "Round" at 108.982,-58.55 h1.5
  text "-" at 127.328,-58.55 h1.5
  text "-" at 155.319,-58.55 h1.5
  text "28" at -6.985,-62.3 h1.5
  text "0.800mm (31.50mil)" at 10.461,-62.3 h1.5
  text "PTH" at 44.101,-62.3 h1.5
  text "Top Layer - Bottom Layer" at 56.748,-62.3 h1.5
  text "Pad" at 94.236,-62.3 h1.5
  text "Round" at 108.982,-62.3 h1.5
  text "-" at 127.328,-62.3 h1.5
  text "-" at 155.319,-62.3 h1.5
  text "30" at -6.985,-66.05 h1.5
  text "0.400mm (15.75mil)" at 10.461,-66.05 h1.5
  text "PTH" at 44.101,-66.05 h1.5
  text "Top Layer - Bottom Layer" at 56.748,-66.05 h1.5
  text "Via" at 94.236,-66.05 h1.5
  text "Round" at 108.982,-66.05 h1.5
  text "-" at 127.328,-66.05 h1.5
  text "-" at 155.319,-66.05 h1.5
  text "134 Total" at -6.985,-69.8 h1.5
  text "Slot definitions :" at -19.632,-73.424 h1.5
  text "Routed Path Length" at 6.186,-73.424 h1.5
  text "= Calculated from tool start centre position to tool end centre position." at 33.752,-73.424 h1.5
  text "Hole Length" at 6.186,-75.923 h1.5
  text "= Routed Path Length + Tool Size = Slot length as defined in the PCB layout" at 23.506,-75.923 h1.5
  text "DOCUMENT NUMBER:" at 313.75,-105 h1.15
  text "'.ProjectPCBFabNumber'_FAB-D" at 313.7,-108 h1.4
  text "'.ProjectPCBFabRevision'" at 330.678,-112.572 h1.5
TITLE MIRROR (M17):
  lines w0.1: -20.9,-112.635 -20.9,-111.365 ; -20.9,-112 -10.74,-112 ; -20.9,-110.8 -20.9,-109.8 ; -20.9,-110.3 -10.9,-110.3 ; -18.36,-112.635 -18.36,-111.365 ; -15.9,-110.6 -15.9,-110 ; -15.82,-112.635 -15.82,-111.365 ; -13.28,-112.635 -13.28,-111.365 ; -10.9,-110.8 -10.9,-109.8 ; -10.74,-112.635 -10.74,-111.365
  lines w0.127: -27.1,-58.175 -22.02,-58.175 ; -27.1,2.15 -22.02,2.15 ; -27.1,62.475 -22.02,62.475 ; -22.02,-109 59.8,-109 ; -22.02,-103 59.8,-103 ; -22,-97 59.82,-97 ; -22,-95.5 59.82,-95.5 ; -22,-91 -21.383,-91 ; -6.7,-113.42 -6.7,-103 ; 0.8,-113.42 0.8,-109 ; 7.82,-88 7.82,-91 -21.383,-91 ; 13.8,-109 13.8,-103 ; 31.82,-113.42 31.82,-97 ; 36.4,-118.5 36.4,-113.42 ; 36.4,117.72 36.4,122.8 ; 59.82,-113.42 59.82,-88 ; 99.9,-118.5 99.9,-113.42 ; 99.9,117.72 99.9,122.8 ; 163.4,-118.5 163.4,-113.42 ; 163.4,117.72 163.4,122.8 ; 226.9,-118.5 226.9,-113.42 ; 226.9,117.72 226.9,122.8 ; 290.4,-118.5 290.4,-113.42 ; 290.4,117.72 290.4,122.8 ; 348.82,-58.175 353.9,-58.175 ; 348.82,2.15 353.9,2.15 ; 348.82,62.475 353.9,62.475 ; -22.02,-113.42 93.82,-113.42 93.82,-88 -22.02,-88 -22.02,-113.42 ; -22.02,-113.42 -22.02,117.72 348.82,117.72 348.82,-113.42 -22.02,-113.42 ; -21.383,-91 -21.383,-91 ; -27.1,-118.5 -27.1,122.8 353.9,122.8 353.9,-118.5 -27.1,-118.5
  text "6" at 5.234,119.498 h1.78
  text "5" at 68.861,119.498 h1.78
  text "4" at 132.336,119.498 h1.78
  text "3" at 196.005,119.498 h1.78
  text "2" at 259.234,119.498 h1.78
  text "1" at 322.624,119.498 h1.78
  text "A" at -23.925,90.466 h1.78
  text "A" at 351.995,90.466 h1.78
  text "B" at -23.925,30.014 h1.78
  text "B" at 351.995,30.014 h1.78
  text "C" at -23.925,-30.311 h1.78
  text "C" at 351.995,-30.311 h1.78
  text "PART NUMBER:" at 6.82,-90 h1.15
  text "'.ProjectpartNumber'" at -5.68,-90.25 h1.5
  text "D" at -23.925,-90.509 h1.78
  text "TITLE:" at 58.82,-90.5 h1.15
  text "D" at 351.995,-90.509 h1.78
  text "'.ProjectTitle'" at 58.82,-94.5 h2.5
  text "GERBER FILE:" at 30.82,-99 h1.15
  text "PCB Layout Contact:" at 58.82,-99 h1.15
  text "'.Plot_File_Name'" at 30.82,-102 h1.5
  text "'.ProjectContactPCB'" at 58.82,-102 h1.78
  text "M" at 90.82,-104 h15.24
  text "DATE:" at -7.9,-105 h1.15
  text "PCB NUMBER:" at 30.8,-105 h1.15
  text "Project Owner:" at 58.82,-105 h1.15
  text "Microchip Technology Inc." at 92.05,-107.26 h1.78
  text "'.PRINT_DATE'" at -7.9,-108 h1.5
  text "'.ProjectPCBFabNumber'" at 30.8,-108 h1.6
  text "'.ProjectContactOwner'" at 58.8,-108 h1.78
  text "2355 W. Chandler Blvd." at 90.82,-110 h1.78
  text "LAYER NAME:" at 30.8,-110.5 h1.15
  text "10mm" at -7.2,-110.6 h0.7
  text "REV:" at 0.05,-110.75 h1.15
  text "PCB FILE NAME:" at 58.8,-110.75 h1.15
  text "400mil" at -7.1,-112.3 h0.7
  text "Chandler, AZ  85224" at 89.82,-112.5 h1.78
  text "'.PCB_FILE_NAME_NO_PATH'" at 58.8,-112.75 h1
  text "6" at 5.234,-116.722 h1.78
  text "5" at 68.861,-116.722 h1.78
  text "4" at 132.336,-116.722 h1.78
  text "3" at 196.005,-116.722 h1.78
  text "2" at 259.234,-116.722 h1.78
  text "1" at 322.624,-116.722 h1.78

## Dimensions
71.4,32.3 to 130.4,25.7 on NOTES (M1)
100.255,35.541 to 130.4,25.7 on NOTES (M1)
0,105 to 39.709,98.6 on NOTES (M1)
10,27.8 to 0,0 on NOTES (M1)
70.35,101.8 to 45.4,111.5 on NOTES (M1)
83.255,36.001 to 90.095,35.541 on NOTES (M1)
83.255,36.001 to 90.095,35.541 on NOTES (M1)
117.255,36.001 to 179.6,52.5 on NOTES (M1)
117.255,69.001 to 179.6,52.5 on NOTES (M1)
46.05,57.95 to 37.4,67.2 on NOTES (M1)
55.55,57.95 to 64.2,67.2 on NOTES (M1)
46.05,47.25 to 40.7,37.8 on NOTES (M1)
55.55,47.25 to 60.9,37.8 on NOTES (M1)
0,0 to 85,-13.6 on NOTES (M1)
0,0 to -2.3,52.5 on NOTES (M1)
0,0 to 170,0 on NOTES (M1)
0,105 to 0,0 on NOTES (M1)
83.255,69.001 to 83.255,36.001 on NOTES (M1)
83.255,69.001 to 117.255,69.001 on NOTES (M1)

## Text inside footprints (layer, text, board x,y; h text height)
J_Breakout1: Top Assembly "1" at 38.6,65.6 h1 r270
J_Breakout2: Top Assembly "1" at 62.1,65.6 h1 r270
J_terminal: Top Assembly "1" at 165.577,49.35 h1 r90
PAD1: Bottom Assembly "Pad" at 46.9,97 h1; Bottom Assembly "Rubber" at 48,99.3 h1
PAD2: Bottom Assembly "Pad" at 164.3,75.4 h1; Bottom Assembly "Rubber" at 165.4,77.7 h1
PAD3: Bottom Assembly "Rubber" at 161.8,11.1 h1; Bottom Assembly "Pad" at 160.7,8.8 h1
PAD4: Bottom Assembly "Pad" at 12.6,8.8 h1; Bottom Assembly "Rubber" at 13.7,11.1 h1
U2: Top Assembly "1" at 148.739,39.327 h1 r270
U3: Top Assembly "1" at 147.291,45.799 h0.5 r180
U4: Top Assembly "1" at 144.891,61.457 h1
U_MCU: Top Assembly "1" at 46.7,57 h1 r270
U_OPAMP: Top Assembly "1" at 18.863,81.138 h1 r180